# Altium PCB PCB.PcbDoc
Units mil, origin at the board's own origin, x right, y up, seen from the top; angles counter-clockwise.
Board outline 3211.75 x 2684.86 mil, 2 copper layers (Top Layer, Bottom Layer), stack 15.3 mil thick; 40 components, 80 nets, 228 pads, 30 vias.
Unrouted connection lines stored in the file: 8.
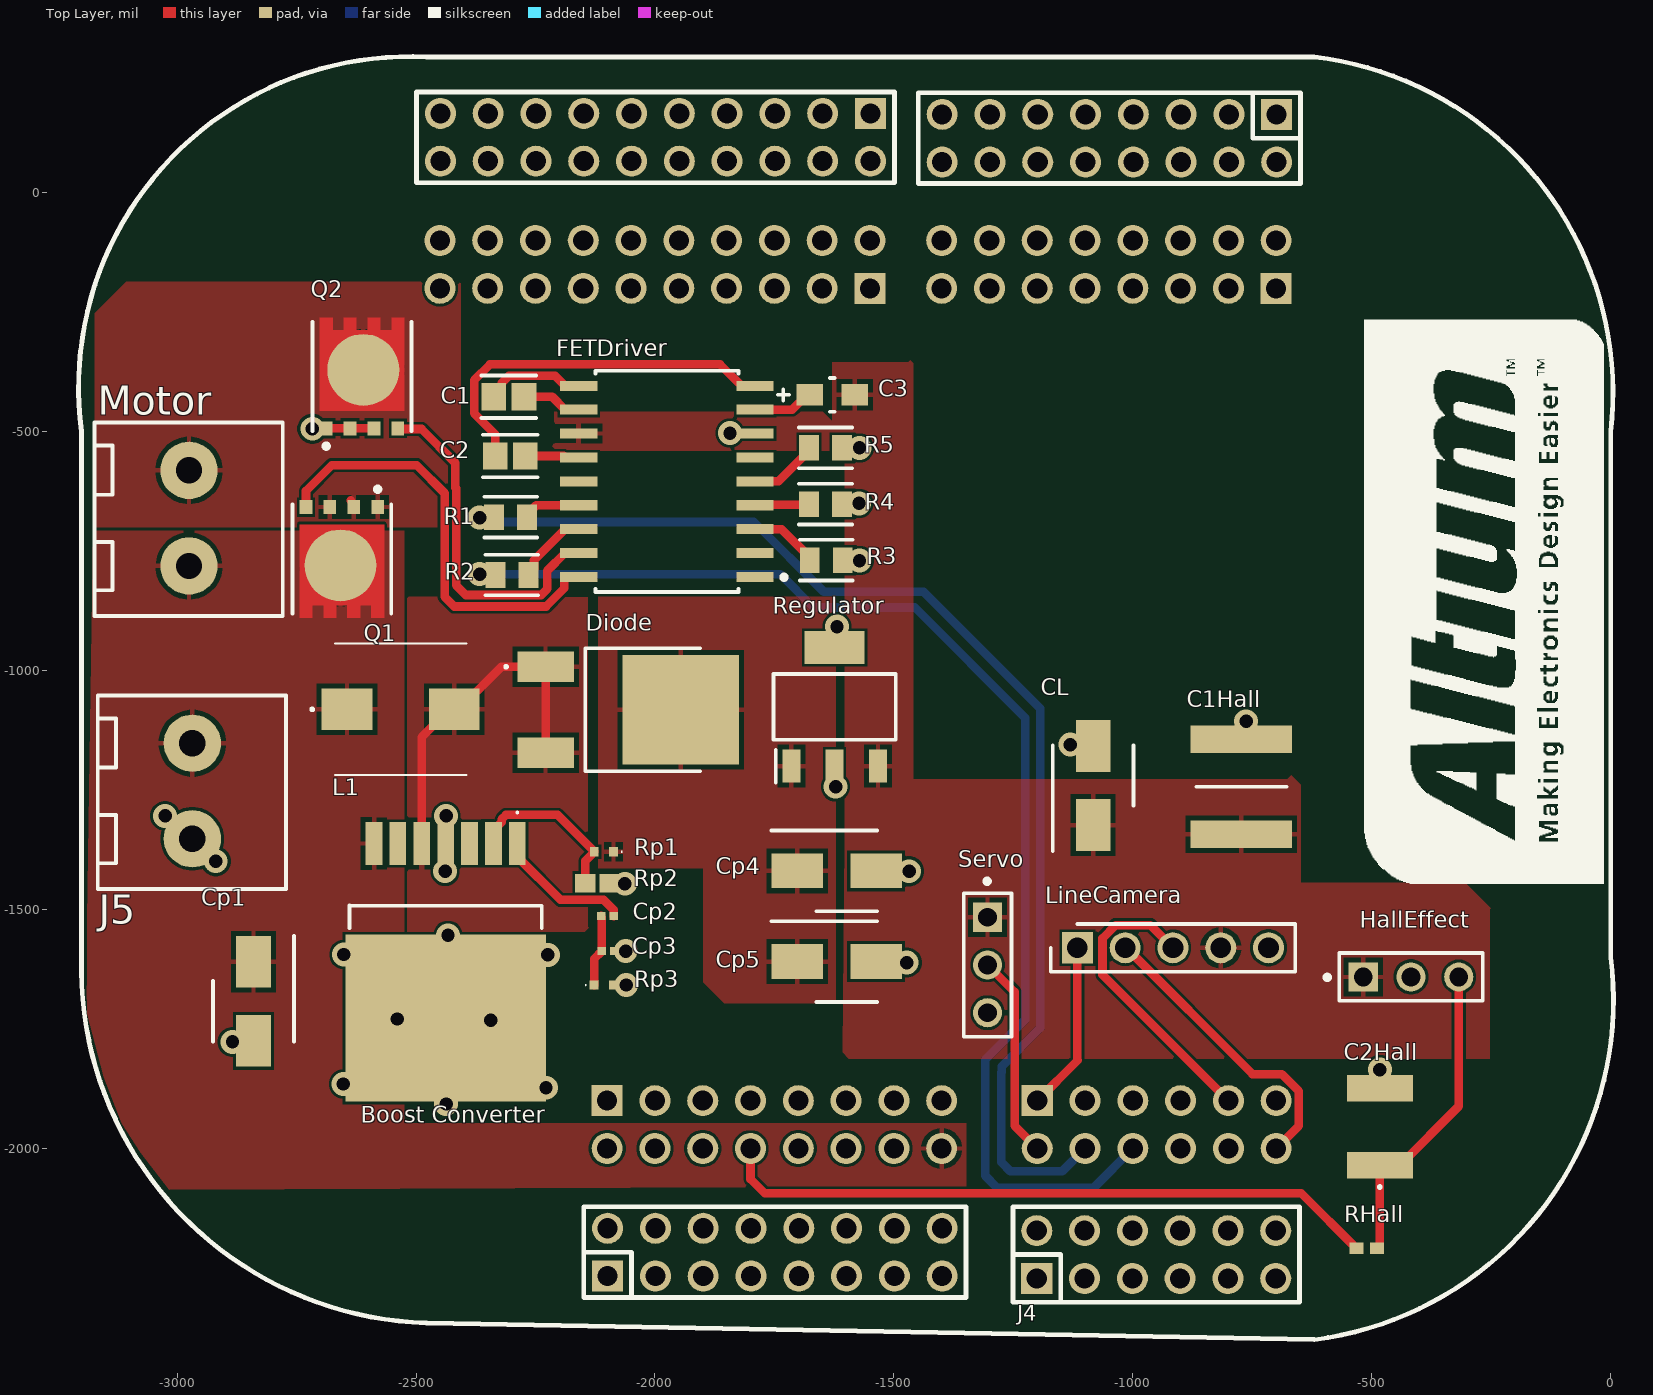
[diagram p0: Top Layer view]
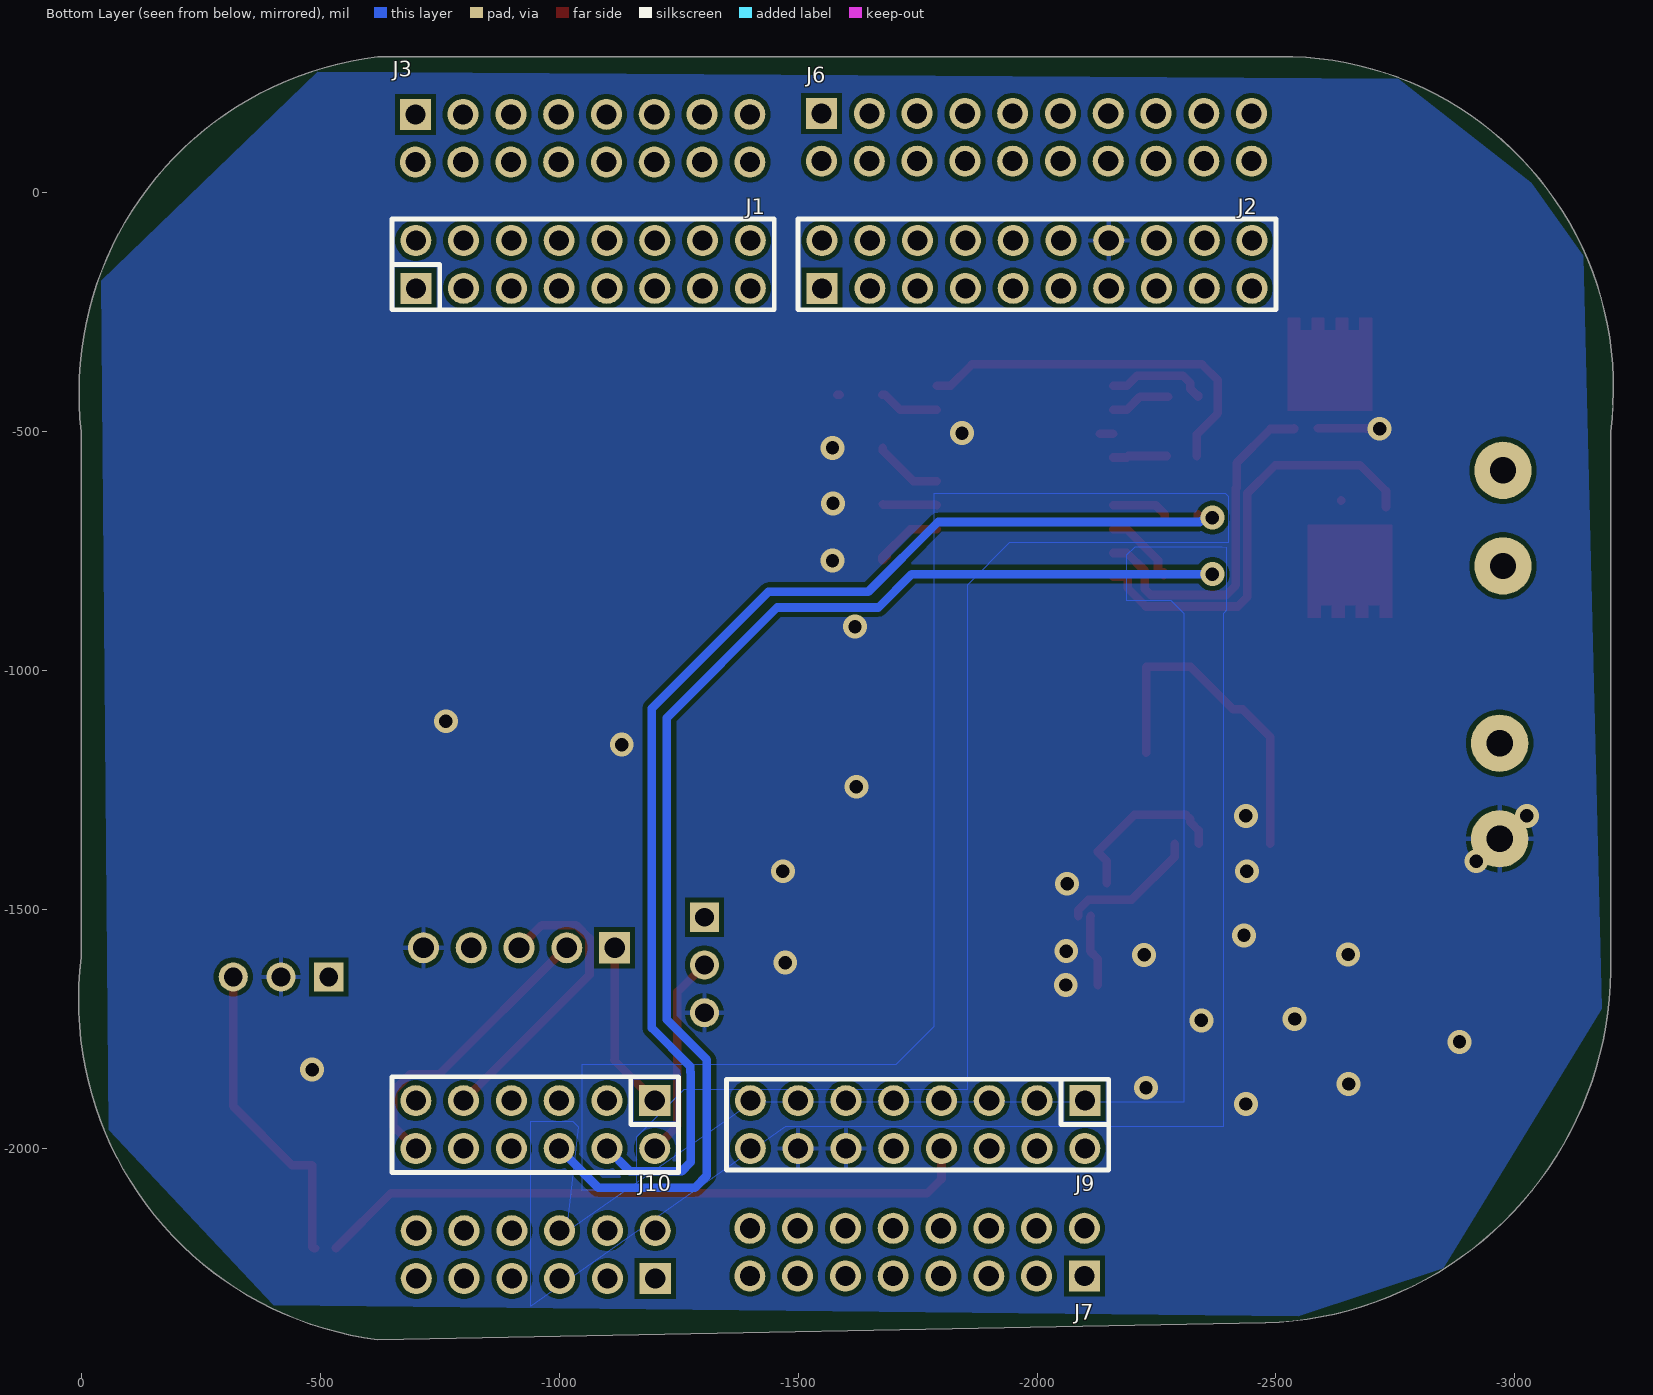
[diagram p1: Bottom Layer view, seen from below]
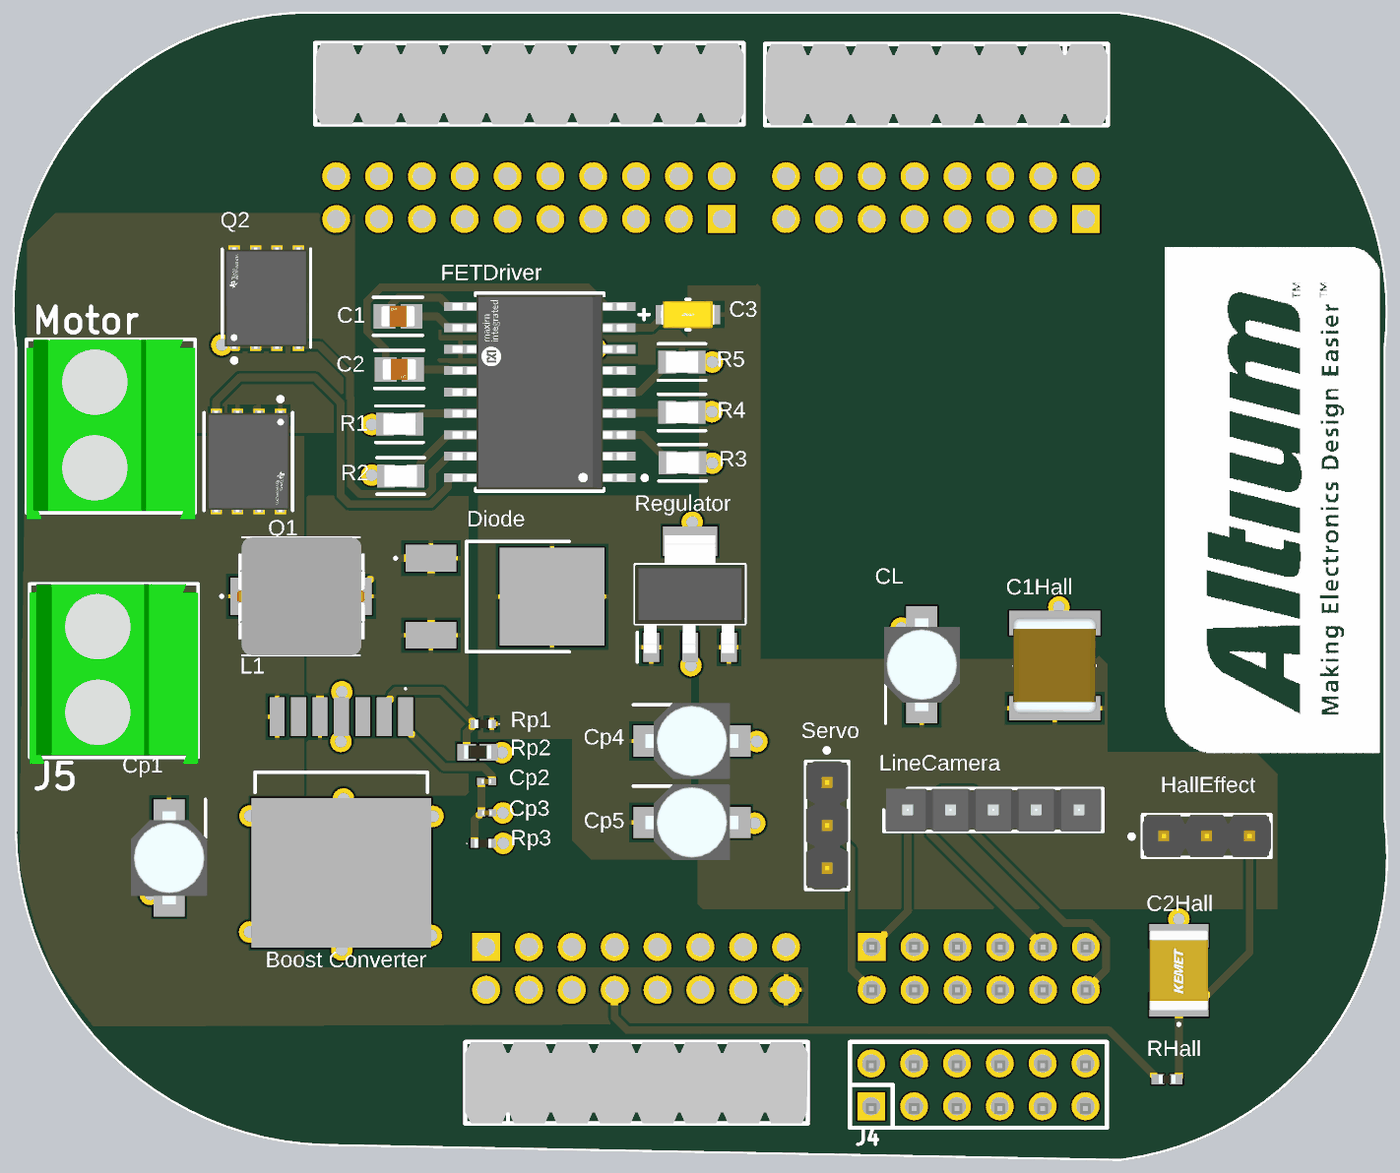
[diagram p2: 3D render of the assembled board from above, using the file's embedded part models]
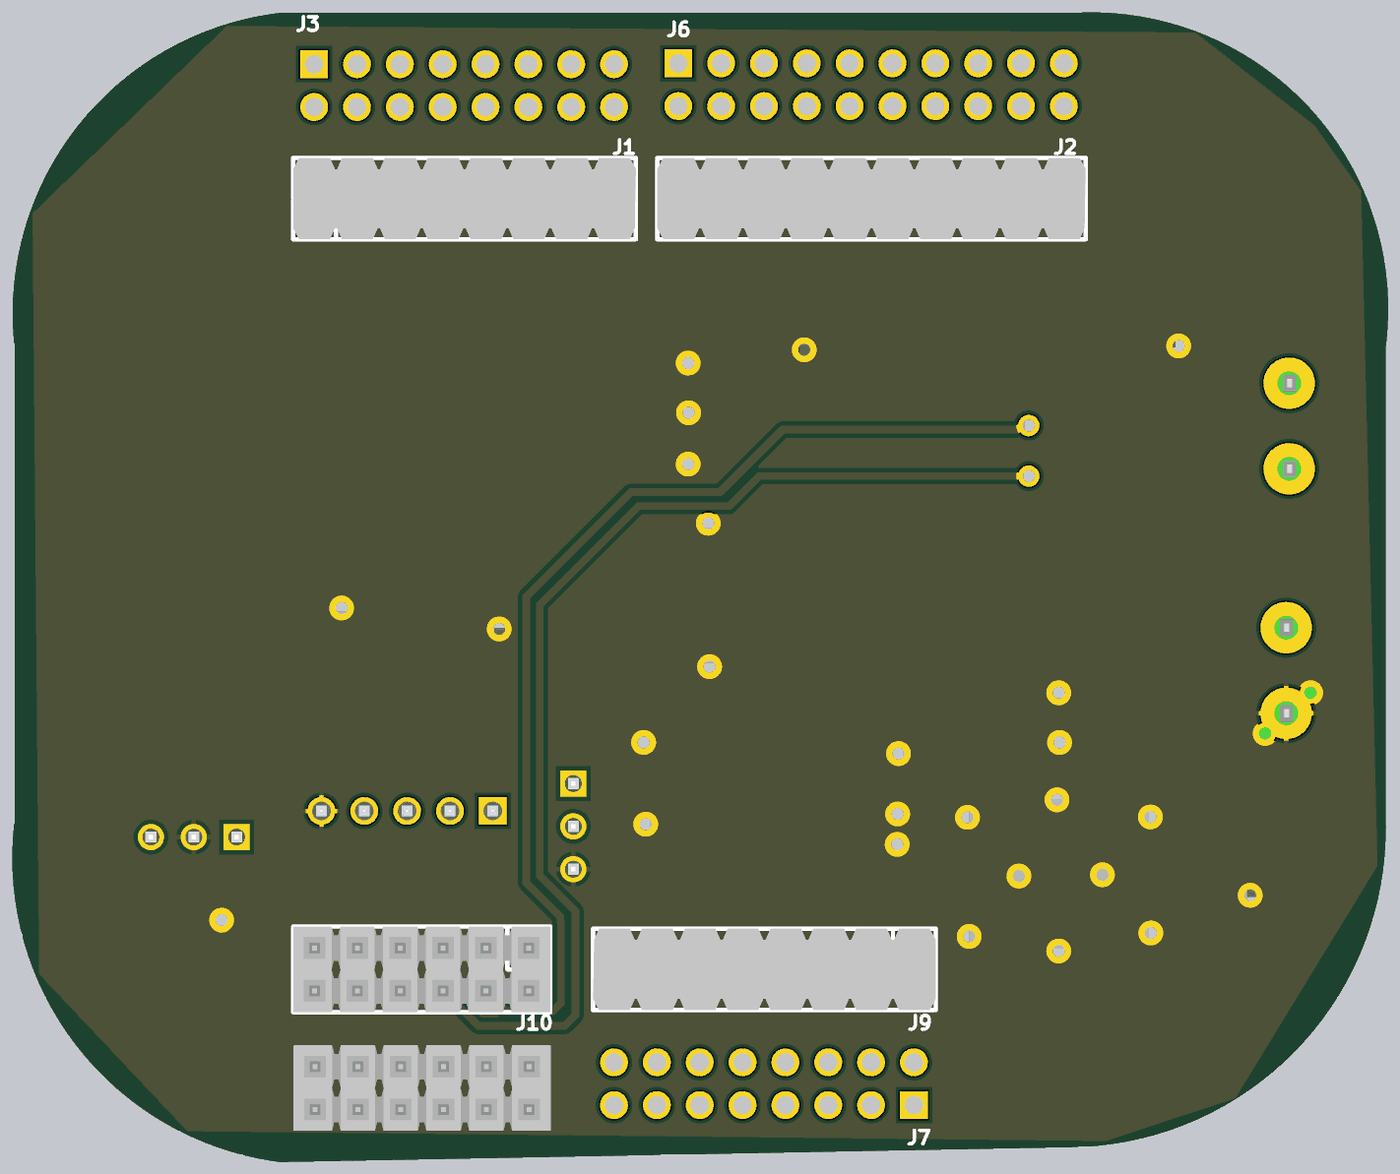
[diagram p3: 3D render of the assembled board from below, using the file's embedded part models]

## Layer stack, top to bottom
Top Solder: solder mask 0.4, Solder Resist, Dk 3.5
Top Layer: signal copper 1.4
Dielectric1: core 12.5, FR-4, Dk 4.8
Bottom Layer: signal copper 1.4
Bottom Solder: solder mask 0.4, Solder Resist, Dk 3.5

## Board outline
-3200,-1600 ccw(c-2456.51,-1621.51) -2478.02,-2365 -620.19,-2400 ccw(c-710.1,-1689.91) 0,-1600 0,-500 ccw(c-702.09,-418.09) -620.19,284 -989,284 -1736,284 -2478.02,284 ccw(c-2513.25,-407.99) -3200,-500

## Design rules (kind name [scope] priority, off if disabled: settings)
AssemblyTestPointUsage [All] p1 off:
AssemblyTestpoint [All] p1 off: testpointundercomponent=TRUE minsize=40 maxsize=100 preferedsize=60 minholesize=0 maxholesize=40 preferedholesize=32 testpointgrid=1 usegrid=TRUE gridtolerance=0.01 allowsidetop=TRUE allowsidebottom=TRUE
Clearance Polygon [(InNet('GND') AND InPoly)] p1: gap=10 ignorepadtopadclearanceinfootprint=FALSE
Clearance [All] p2: gap=6 ignorepadtopadclearanceinfootprint=FALSE
ComponentClearance [All] p1: gap=0 collisioncheckmode=3 verticalgap=0 showdistances=FALSE
FabricationTestPointUsage [All] p1 off: valid=0 allowmultiple=FALSE
FabricationTestpoint [All] p1 off: side=3 testpointundercomponent=TRUE minsize=40 maxsize=100 preferedsize=60 minholesize=0 maxholesize=40 preferedholesize=32 testpointgrid=1 allowsidetop=TRUE allowsidebottom=TRUE usegrid=TRUE gridtolerance=0.01
Height [All] p1: minheight=0 maxheight=1500 prefheight=500
HoleSize [All] p1: absolutevalues=TRUE maxlimit=250 minlimit=1 maxpercent=80.000 minpercent=20.000
HoleToHoleClearance [All] p1: gap=2 allowstackedmicrovias=TRUE
MinimumSolderMaskSliver [All] p1: minsoldermaskwidth=8.7
PlaneConnect [All] p1: planeconnectstyle=Direct reliefexpansion=20 reliefentries=4 reliefconductorwidth=10 reliefairgap=10
PolygonConnect PolygonConnect_1 [IsVia] p1: connectstyle=Direct reliefconductorwidth=10 reliefentries=4 polygonreliefangle="90 Angle" airgapwidth=10
PolygonConnect [All] p2: connectstyle=Relief reliefconductorwidth=10 reliefentries=4 polygonreliefangle="90 Angle" airgapwidth=10
RoutingVias [All] p1: holewidth=23.62 width=39.37 viastyle="Through Hole" minholewidth=23.62 minwidth=39.37 maxholewidth=50 maxwidth=100
ShortCircuit ShortCircuit_1 [HasFootprint('4-40 X 250') vs HasFootprint('4-40 X 250')] p1: allowed=FALSE
ShortCircuit [All] p2: allowed=FALSE
SilkToSilkClearance [All] p1: silktosilkclearance=0
SilkToSolderMaskClearance [IsPad] p1: minsilkscreentomaskgap=5.51 clearancetoexposedcopper=TRUE
SilkToSolderMaskClearance SilkscreenOverComponentPads [IsPad] p2: minsilkscreentomaskgap=0 clearancetoexposedcopper=TRUE
SolderMaskExpansion SolderMaskExpansion_1 [InComponent('LineCamera')] p1: expansion=0 istentingtop=FALSE
SolderMaskExpansion [All] p2: expansion=4 istentingtop=FALSE
UnRoutedNet [All] p1 off: checkbadconnections=TRUE
Width Vsw [InNet('VSW')] p1: maxlimit=31.8 minlimit=30.8 preferedwidth=30.8
Width [All] p2: maxlimit=18 minlimit=12 preferedwidth=18
16 further rules are at their usual default settings.

## Classes and differential pairs
component class Motor_Controller: C1 C2 C3 FETDriver Motor Q1 R1 R2 R3 R4 R5 Servo
component class "DC_DC Power Supply": "Boost Converter" C1Hall C2Hall CL Cp1 Cp2 Cp3 Cp4 Cp5 Diode HallEffect L1 LineCamera Regulator RHall Rp1 Rp2 Rp3
component class Connectors: J1 J2 J3 J4 J5 J6 J7 J9 J10

## Components (designator, comment, footprint, x,y, rotation, side; value= is the part's Value field where it differs from the comment)
"Boost Converter" "LT1370CR#PBF" LT1370CRPBF -2438,-1602 r180 top
C1 "08055C473JAT2A" FP-0805-L_2_01_0_2-W_1_25-IPC_B -2305.72,-427 r180 top
C1Hall "100nF" CAPC5750X450N -773,-1243 r90 top
C2 "08055C473JAT2A" FP-0805-L_2_01_0_2-W_1_25-IPC_B -2302.72,-551 r0 top
C2Hall "4.7nF" C1812 -483,-1954.71 r90 top
C3 "T491A105K025AT" FP-T491A105K025AT-MFG -1629,-423 r180 top
CL "22uF" CAPAE430X550N -1083,-1240.68 r90 top
Cp1 "22uF" CAPAE430X550N -2840,-1692 r270 top
Cp2 "0.047uF" CAPC0603X33N -2099.13,-1513.57 r180 top
Cp3 "0.0047uF" CAPC0603X33N -2098.15,-1586.57 r0 top
Cp4 "22uF" CAPAE430X550N -1619.68,-1419 r0 top
Cp5 "0.47uF" CAPAE430X550N -1619.68,-1609 r0 top
Diode "MBRD835L" MBRD835L -2026,-1082 r180 top
FETDriver "MAX620CWN+" FP-W18-1-MFG -1975,-604 r180 top
HallEffect "90120-0763" FP-90120-0763-MFG -418,-1641 r0 top
J1 "67996-416HLF" 67996-416HLF#1 -1050,-150 r180 bottom locked
J2 "67996-420HLF" 67996-420HLF#1 -2000,-150 r180 bottom locked
J3 "67996-416HLF" 67996-416HLF#2 -1050,116 r0 bottom
J4 "67996-412HLF" 67996-412HLF#1 -951,-2227 r180 top locked
J5 "282857-2" 282857-2 -2968,-1152 r180 top
J6 "67996-420HLF" 67996-420HLF#2 -1999,116 r0 bottom
J7 "67996-416HLF" 67996-416HLF#2 -1748,-2219 r180 bottom locked
J9 "67996-416HLF" 67996-416HLF#1 -1750,-1950 r0 bottom locked
J10 "67996-412HLF" 67996-412HLF#2 -950,-1950 r0 bottom locked
L1 "4.7uH" ETQ-P4M_KFM -2532.2,-1081 r0 top
LineCamera "61300511121" HDRV5W64P0X254_1X5_1270X254X854P -1116,-1580 r0 top
Motor "282857-2" 282857-2 -2975,-581 r180 top
Q1 "CSD17306Q5A" FP-DQJ0008A-MFG -2655.24,-766.22 r270 top
Q2 "CSD17306Q5A" FP-DQJ0008A-MFG -2613,-384.63 r90 top
R1 "CR0805-JW-103ELF" FP-CR0805-IPC_B -2302,-679 r0 top
R2 "CR0805-JW-103ELF" FP-CR0805-IPC_B -2299.47,-800 r0 top
R3 "CR0805-JW-103ELF" FP-CR0805-IPC_B -1641.53,-769 r180 top
R4 "CR0805-JW-103ELF" FP-CR0805-IPC_B -1643,-651.53 r180 top
R5 "CR0805-JW-103ELF" FP-CR0805-IPC_B -1643,-534.06 r180 top
Regulator "LM2940IMPX-5.0_NOPB" SOT230P700X180-4N -1624,-1076 r90 top
RHall "10k" RESC1005X40N -510.65,-2209 r0 top
Rp1 "59K" ERJ2RKD1004X -2106.84,-1379 r180 top
Rp2 "6.8K" RESC1608X55N -2120,-1445 r0 top
Rp3 "2K" ERJ2RKD1004X -2107.16,-1658 r0 top
Servo "90120-0763" FP-90120-0763-MFG -1304,-1616 r270 top

## Footprints (in the part's own frame and the unit in brackets; to place one, negate y for a bottom-side part, rotate by r counter-clockwise, add the part's x,y. Pads: shape width x height; smd on the part's side, far side on the other; paste and mask are expansions set on the pad)
67996-412HLF#1 [mil] "CONN HEADER 12POS .100 STR TIN"
  rect 65x65 hole 42: 1(250,45)
  round 65 hole 42: 2(250,-55) 3(150,45) 4(150,-55) 5(50,45) 6(50,-55) 7(-50,45) 8(-50,-55) 9(-150,45) 10(-150,-55) 11(-250,45) 12(-250,-55)
  silkscreen extent -300,-105 300,95, body extent -300,-100 300,100, height 80
67996-412HLF#2 [mil] "CONN HEADER 12POS .100 STR TIN"
  rect 65x65 hole 42: 1(-250,-50)
  round 65 hole 42: 2(-250,50) 3(-150,-50) 4(-150,50) 5(-50,-50) 6(-50,50) 7(50,-50) 8(50,50) 9(150,-50) 10(150,50) 11(250,-50) 12(250,50)
  silkscreen extent -300,-100 300,100, body extent -300,-100 300,100, height 331
67996-416HLF#1 [mil] "CONN HEADER 16POS .100 STR TIN"
  rect 65x65 hole 42: 1(-350,-50)
  round 65 hole 42: 2(-350,50) 3(-250,-50) 4(-250,50) 5(-150,-50) 6(-150,50) 7(-50,-50) 8(-50,50) 9(50,-50) 10(50,50) 11(150,-50) 12(150,50) 13(250,-50) 14(250,50) 15(350,-50) 16(350,50)
  silkscreen extent -400,-95 400,95, body extent -400,-95 400,95, height 305
67996-416HLF#2 [mil] "CONN HEADER 16POS .100 STR TIN"
  rect 65x65 hole 42: 1(351,-48)
  round 65 hole 42: 2(351,52) 3(251,-48) 4(251,52) 5(151,-48) 6(151,52) 7(51,-48) 8(51,52) 9(-49,-48) 10(-49,52) 11(-149,-48) 12(-149,52) 13(-249,-48) 14(-249,52) 15(-349,-48) 16(-349,52)
  body extent -399,-93 401,97, height 305
67996-420HLF#1 [mil] "CONN HEADER 20POS .100 STR TIN"
  rect 65x65 hole 42: 1(-450,-50)
  round 65 hole 42: 2(-450,50) 3(-350,-50) 4(-350,50) 5(-250,-50) 6(-250,50) 7(-150,-50) 8(-150,50) 9(-50,-50) 10(-50,50) 11(50,-50) 12(50,50) 13(150,-50) 14(150,50) 15(250,-50) 16(250,50) 17(350,-50) 18(350,50) 19(450,-50) 20(450,50)
  silkscreen extent -500,-95 500,95, body extent -500,-95 500,95, height 305
67996-420HLF#2 [mil] "CONN 20 PIN 0.100 IN"
  rect 65x65 hole 42: 1(450,-50)
  round 65 hole 42: 2(450,50) 3(350,-50) 4(350,50) 5(250,-50) 6(250,50) 7(150,-50) 8(150,50) 9(50,-50) 10(50,50) 11(-50,-50) 12(-50,50) 13(-150,-50) 14(-150,50) 15(-250,-50) 16(-250,50) 17(-350,-50) 18(-350,50) 19(-450,-50) 20(-450,50)
  body extent -500,-95 500,95, height 305
282857-2 [mil] "TE CONNECTIVITY / BUCHANAN  282857-2  Wire-To-Board Terminal Block, 2, 300 V, 24 A, 30 AWG, 12 AWG, 3 mm²"
  round 120 hole 55: 1(0,0) 2(0,200)
  silkscreen extent -196,-100 198,305, body extent -196,-100 198,320, height 752
C1812 [mm]
  rect 1.4x3.5 smd: 1(-2.05,0) 2(2.05,0)
  silkscreen extent -3.25,-0.05 -3.15,0.05, body extent -2.4,-1.75 2.4,1.75, height 1.4
CAPAE430X550N [mm]
  rect 2.75x1.85 smd: 1(-2.1,0) 2(2.1,0)
  silkscreen extent -3.47,-2.15 2.15,2.15, body extent -2.75,-2.25 2.75,2.25, height 5.5
CAPC0603X33N [mm]
  rect 0.46x0.42 smd: 1(-0.33,0) 2(0.33,0)
  body extent -0.3,-0.15 0.3,0.15, height 0.33
CAPC5750X450N [mm]
  rect 1.45x5.41 smd: 1(-2.53,0) 2(2.53,0)
  silkscreen extent 0,-2.4 0,2.4, body extent -2.85,-2.5 2.85,2.5, height 4.5
ERJ2RKD1004X [mm]
  rect 0.475x0.5 smd: 1(-0.512,0) 2(0.512,0)
  silkscreen extent -0.97,-0.03 -0.93,0.03, body extent -0.5,-0.25 0.5,0.25, height 0.35
ETQ-P4M_KFM [mm]
  rect 2.7x2.2 smd: 1(-2.85,0) 2(2.85,0)
  silkscreen extent -4.75,-3.5 3.5,3.5, body extent -3.78,-3.5 3.79,3.5, height 5.4
FP-0805-L_2_01_0_2-W_1_25-IPC_B [mil]
  rect 51.36x57.33 smd paste+0 mask+0: 1(-31.72,0) 2(31.72,0)
  silkscreen extent -57,-44 57,44, body extent -67,-39 67,39, height 10
FP-90120-0763-MFG [mm]
  rect 1.55x1.55 hole 1 paste-2539.97 mask+0: 1(-2.54,0)
  round 1.55 hole 1 paste-2539.97 mask+0: 2(0,0) 3(2.54,0)
  silkscreen extent -4.57,-1.27 3.81,1.27, body extent -3.91,-1.37 3.91,1.37, height 0.25
FP-CR0805-IPC_B [mil]
  rect 41.66x53.63 smd paste+0 mask+0: 1(-34.53,0) 2(34.53,0)
  silkscreen extent -55,-43 55,43, body extent -65,-37 65,37, height 10
FP-DQJ0008A-MFG [mm]
  rect 0.75x0.675 smd paste-1000 mask+0: 1(-2.752,1.905) 2(-2.752,0.635) 3(-2.752,-0.635) 4(-2.752,-1.905)
  round 3.821 smd paste-1000 mask+0: 5-6-7-8(0.35,-0.07)
  Top Layer region: 3.127,-2.242 3.127,-1.568 2.472,-1.568 2.472,-0.972 3.127,-0.972 3.127,-0.297 2.472,-0.297 2.472,0.298 3.127,0.298 3.127,0.973 2.472,0.973 2.472,1.568 3.127,1.568 3.127,2.243 -1.823,2.242 -1.823,-2.242
  silkscreen extent -3.82,-2.63 2.9,2.63, body extent -3.23,-2.6 3.23,2.6, height 0.25
FP-T491A105K025AT-MFG [mm]
  rect 1.42x1.13 smd paste+0 mask+0: 1(-1.2,0) 2(1.2,0)
  silkscreen extent -0.12,-0.9 2.9,0.9, body extent -2.03,-1.02 2.03,1.02, height 0.25
FP-W18-1-MFG [mil]
  rect 77.99x20.98 smd paste+0 mask+0: 1(-184.51,200) 2(-184.51,150) 3(-184.51,100) 4(-184.51,50) 5(-184.51,0) 6(-184.51,-50) 7(-184.51,-100) 8(-184.51,-150) 9(-184.51,-200) 10(184.51,-200) 11(184.51,-150) 12(184.51,-100) 13(184.51,-50) 14(184.51,0) 15(184.51,50) 16(184.51,100) 17(184.51,150) 18(184.51,200)
  silkscreen extent -250,-231 150,231, body extent -227,-238 227,238, height 10
HDRV5W64P0X254_1X5_1270X254X854P [mm]
  rect 1.65x1.65 hole 1.1: 1(0,0)
  round 1.65 hole 1.1: 2(2.54,0) 3(5.08,0) 4(7.62,0) 5(10.16,0)
  silkscreen extent -1.42,-1.27 11.58,1.27, body extent -1.27,-1.27 11.43,1.27, height 8.54
LT1370CRPBF [mil]
  rect 35x90 smd: 1(-150,-240) 2(-100,-240) 3(-50,-240) 4(0,-240) 5(50,-240) 6(100,-240) 7(150,-240)
  rect 420x350 smd: 8(0,125)
  silkscreen extent -201,-307 201,-63
MBRD835L [mm]
  rect 3x1.6 smd: 1(5.152,-2.285) 3(5.152,2.285)
  rect 6.2x5.8 smd: 2(-2.028,0)
  silkscreen extent -3.05,-3.27 7.3,3.27
RESC1005X40N [mm]
  rect 0.75x0.6 smd: 1(-0.55,0) 2(0.55,0)
  body extent -0.5,-0.25 0.5,0.25, height 0.4
RESC1608X55N [mm]
  rect 1.1x1 smd: 1(-0.65,0) 2(0.65,0)
  body extent -0.8,-0.4 0.8,0.4, height 0.55
SOT230P700X180-4N [mm]
  rect 1.75x0.95 smd: 1(-3.15,2.3) 2(-3.15,0) 3(-3.15,-2.3)
  rect 1.75x3.2 smd: 4(3.15,0)
  silkscreen extent -4.03,-3.25 1.75,3.25, body extent -3.5,-3.25 3.5,3.25, height 1.68

## Part data
"Boost Converter": "12V Boost Converter", Manufacturer_Name="Analog Devices", Mouser Part Number=584-LT1370CR#PBF, Arrow Part Number=LT1370CR#PBF, Arrow Price/Stock=https://www.arrow.com/en/products/lt1370crpbf/analog-devices?utm_currency=USD&region=nac, Datasheet Link=https://www.analog.com/media/en/technical-documentation/data-sheets/1370fs.pdf, Height=4.877mm, Manufacturer_Part_Number=LT1370CR#PBF, Mouser Price/Stock=https://www.mouser.co.uk/ProductDetail/Analog-Devices/LT1370CRPBF?qs=ytflclh7QUVSQHKAEhLuUA%3D%3D
C1 C2: library part CMP-2007-04425-2, "General Purpose Ceramic Capacitor, 0805, 47nF, 5%, X7R, 0.15, 50V", Capacitance=47nF, Case Code (Imperial)=0805, Case Code (Metric)=2012, Dielectric=X7R, Dielectric Material=Ceramic, Max Operating Temperature=125°C, Min Operating Temperature=-55°C, Package Quantity=1, Tolerance=10%, Voltage=50V, Case/Package=0805, Construction=Flat, Contact Plating=Tin, Depth=1.25mm, Dissipation Factor=2.5%, Height=0.94mm, Lead Free="Lead Free", Length=2.01mm, Mount="Surface Mount", Number of Pins=2, Packaging="Tape and Reel", Radiation Hardening=No, REACH SVHC="No SVHC", RoHS Compliant=Yes, Series=-, Termination=SMD/SMT, Thickness=0.037inch, Voltage Rating=50V, Voltage Rating (DC)=50V, Width=0.049inch
C1Hall: library part 2220Y2K00104KXRWS3, "Capacitor", Manufacturer_Name=Knowles, Mouser Part Number=843-2220Y2K104KXRWS2, Datasheet Link=https://www.knowlescapacitors.com/getattachment/e7984308-bd6c-4e1d-824e-8ae6037a2b25/StackiCap, Height=4.5mm, Manufacturer_Part_Number=2220Y2K00104KXRWS3, Mouser Price/Stock=https://www.mouser.co.uk/ProductDetail/Knowles-Syfer/2220Y2K00104KXRWS3?qs=7MVldsJ5UaxGI75VDyrs7w%3D%3D
C2Hall: library part C1812C472KGRACAUTO, "Capacitor", Manufacturer_Name=KEMET, Mouser Part Number=80-C1812C472KGRAUTO, Arrow Part Number=C1812C472KGRACAUTO, Arrow Price/Stock=https://www.arrow.com/en/products/c1812c472kgracauto/kemet-corporation, Datasheet Link=https://content.kemet.com/datasheets/KEM_C1076_X7R_HV_AUTO_SMD.pdf, Height=1.55mm, Manufacturer_Part_Number=C1812C472KGRACAUTO, Mouser Price/Stock=https://www.mouser.co.uk/ProductDetail/KEMET/C1812C472KGRACAUTO?qs=f9yNj16SXrLK%252BHmDDKifeA%3D%3D
C3: library part CMP-03017-000047-1, "CAP TANT 1UF 10% 25V 1206", Capacitance=1uF, Case Code (Imperial)=1206, Case Code (Metric)=3216, Dielectric Material=Tantalum, ESR (Equivalent Series Resistance)=8R, Leakage Current=500nA, Max Operating Temperature=125°C, Min Operating Temperature=-55°C, Package Quantity=1, Tolerance=20%, Voltage=25V, Case/Package=1206, Depth=1.6mm, Dissipation Factor=4%, Features="General Purpose", Height=1.6mm, Height - Seated (Max)=0.071inch, Lead Free="Lead Free", Lead Pitch=1.2mm, Length=3.2mm, Life (Hours)=2000Hour, Mount="Surface Mount", Number of Pins=2, Packaging="Tape and Reel", Polarity=Polar, Radiation Hardening=No, REACH SVHC="No SVHC", RoHS Compliant=Yes, Termination=SMD/SMT, Voltage Rating=25V, Voltage Rating (DC)=25V, Width=1.6mm
CL Cp1 Cp4: library part UWP1HR22MCL1GB, "Capacitor Polarised", Manufacturer_Name=Nichicon, Mouser Part Number=647-UWP1HR22MCL, Datasheet Link=https://www.nichicon.co.jp/english/series_items/catalog_pdf/e-uwp.pdf, Height=5.5mm, Manufacturer_Part_Number=UWP1HR22MCL1GB, Mouser Price/Stock=https://www.mouser.co.uk/ProductDetail/Nichicon/UWP1HR22MCL1GB?qs=3GbUB62Nf7dRFOPfOwO6sg%3D%3D
Cp2: library part GRM033R61C473KE84D, "Capacitor", Manufacturer_Name="Murata Electronics", Mouser Part Number=81-GRM033R61C473KE4D, Arrow Part Number=GRM033R61C473KE84D, Arrow Price/Stock=https://www.arrow.com/en/products/grm033r61c473ke84d/murata-manufacturing, Datasheet Link=https://search.murata.co.jp/Ceramy/image/img/A01X/G101/ENG/GRM033R61C473KE84-01A.pdf, Height=0.33mm, Manufacturer_Part_Number=GRM033R61C473KE84D, Mouser Price/Stock=https://www.mouser.co.uk/ProductDetail/Murata-Electronics/GRM033R61C473KE84D?qs=vCoBJ5OiJk4E%252B%2Fgs75qrtQ%3D%3D
Cp3: library part GRM033R71A472KA01D, "Capacitor", Manufacturer_Name="Murata Electronics", Mouser Part Number=81-GRM033R71A472KA1D, Arrow Part Number=GRM033R71A472KA01D, Arrow Price/Stock=https://www.arrow.com/en/products/grm033r71a472ka01d/murata-manufacturing, Datasheet Link=https://search.murata.co.jp/Ceramy/image/img/A01X/G101/ENG/GRM033R71A472KA01-01A.pdf, Height=0.33mm, Manufacturer_Part_Number=GRM033R71A472KA01D, Mouser Price/Stock=https://www.mouser.co.uk/ProductDetail/Murata-Electronics/GRM033R71A472KA01D?qs=7RtWncwVCuzI4WvsbOl%2FQA%3D%3D
Cp5: library part 865230640004, "Capacitor Polarised", Manufacturer_Name="Wurth Elektronik", Mouser Part Number=710-865230640004, Datasheet Link=https://componentsearchengine.com/Datasheets/1/865230640004.pdf, Height=5.5mm, Manufacturer_Part_Number=865230640004, Mouser Price/Stock=https://www.mouser.co.uk/ProductDetail/Wurth-Elektronik/865230640004?qs=0KOYDY2FL2%2FYTqRiFtrQpw%3D%3D
Diode: "Diode", Manufacturer_Name=onsemi, Mouser Part Number=863-MBRD835L, Datasheet Link=https://www.onsemi.com/pdf/datasheet/mbrd835l-d.pdf, Height=2.38mm, Manufacturer_Part_Number=MBRD835L, Mouser Price/Stock=https://www.mouser.co.uk/ProductDetail/onsemi/MBRD835L?qs=3JMERSakebplE9MTkRawVw%3D%3D
FETDriver: library part CMP-05716-000008-1, "IC GATE DRVR HIGH-SIDE 18SOIC", Case/Package=SOIC, Max Operating Temperature=70°C, Max Output Current=25mA, Max Power Dissipation=762mW, Max Supply Current=500uA, Max Supply Voltage=16.5V, Min Operating Temperature=0°C, Min Supply Voltage=4.5V, Package Quantity=40, Fall Time=2500ns, Lead Free="Lead Free", Mount="Surface Mount", Nominal Supply Current=500uA, Number of Drivers=4, Number of Outputs=4, Number of Pins=18, Packaging=Rail/Tube, Radiation Hardening=No, Rise Time=1700ns, RoHS Compliant=Yes, Series=-, Supply Current=500uA
HallEffect Servo: library part CMP-04776-000084-1, "CONN HEADER VERT 3POS 2.54MM", Current Rating=3A, Manufacturer=Molex, Temperature="-55°C to +125°C", Temperature Range High=+125°C, Temperature Range Low=-55°C, Voltage Rating=350V, Automotive=No, Category=Conn, ComponentLink2Description=Datasheet, ComponentLink2URL=https://www.molex.com/webdocs/datasheets/pdf/en-us/0901200763_PCB_HEADERS.pdf, Conn Gender=Male, Conn Orientation=Vertical, Contact Material=Gold,Nickel, Device Class L1=Connectors, Device Class L2="Headers and Wire Housings", Device Class L3=unset, Digikey Description="CONN HEADER VERT 3POS 2.54MM", Footprint Url=https://www.molex.com/pdm_docs/sd/901200763_sd.pdf, Height=5.8mm, Lead Free=Yes, Manufacturer Part Number=90120-0763, Mouser Description="Board-To-Board Connector, C-Grid III 90120 Series, Through Hole, Header, 3, 2.54 mm", Number of Contacts=3, Number of Rows=1, Octopart=https://octopart.com/90120-0763-molex-655433, Package=90120-0763, Pitch=2.54mm, RoHS=TRUE
J1 J9: "CONN HEADER 16POS .100 STR TIN", Color=Black, Manufacturer=FCI, Supplier Part Number 1=609-3220-ND, Category="Connectors, Interconnects", ComponentLink1Description=http://portal.fciconnect.com/Comergent//fci/drawing/67996.pdf, ComponentLink1URL=http://portal.fciconnect.com/Comergent//fci/drawing/67996.pdf, Connector Type="Header, Unshrouded", Contact Finish=Tin, Contact Finish Thickness="100µin (2.54µm)", Contact Mating Length="0.230\" (5.84mm)", Contact Type="Male Pin", Fastening Type=-, Features=-, Manufacturer Part Number=67996-416HLF, Mounting Type="Through Hole", Number of Positions=16, Number of Positions Loaded=All, Number of Rows=2, Packaging=Bulk, Pitch="0.100\" (2.54mm)", Pricing 1="1=0.56, 10=0.521, 25=0.4684, 50=0.4164, 100=0.3991, 250=0.36436, 500=0.347, 1000=0.28628, 2500=0.26025 (USD)", RoHS="RoHS Compliant", Row Spacing="0.100\" (2.54mm)", Stock 1=1589, Supplier 1=Digi-Key, Termination=Solder
J2: "CONN HEADER 20POS .100 STR TIN", Color=Black, Manufacturer=FCI, Supplier Part Number 1=609-3221-ND, Category="Connectors, Interconnects", ComponentLink1Description=http://portal.fciconnect.com/Comergent//fci/drawing/67996.pdf, ComponentLink1URL=http://portal.fciconnect.com/Comergent//fci/drawing/67996.pdf, Connector Type="Header, Unshrouded", Contact Finish=Tin, Contact Finish Thickness="100µin (2.54µm)", Contact Mating Length="0.230\" (5.84mm)", Contact Type="Male Pin", Fastening Type=-, Features=-, Manufacturer Part Number=67996-420HLF, Mounting Type="Through Hole", Number of Positions=20, Number of Positions Loaded=All, Number of Rows=2, Packaging=Bulk, Pitch="0.100\" (2.54mm)", Pricing 1="1=0.66, 10=0.619, 25=0.5572, 50=0.4952, 100=0.4745, 250=0.43324, 500=0.4126, 1000=0.3404, 2500=0.30945 (USD)", RoHS="RoHS Compliant", Row Spacing="0.100\" (2.54mm)", Stock 1=596, Supplier 1=Digi-Key, Termination=Solder
J3 J7: "CONN HEADER 16POS .100 STR TIN", Supplier Part Number 1="Mouser - 649-67996-416HLF", Supplier 1=Octopart
J4: "CONN HEADER 12POS .100 STR TIN", Supplier Part Number 1="Mouser - 649-67996-412HLF", Supplier 1=Octopart
J5 Motor: "TERM BLOCK 2POS SIDE ENT 5.08MM", Color=Green, Current=24A, Manufacturer="TE Connectivity", Operating Temperature=-, Supplier Part Number 1=A98359-ND, Voltage=300V, Category="Connectors, Interconnects", Clamp Material - Plating="Brass - Nickel Plated", ComponentLink1Description=http://documents.tycoelectronics.com/commerce/DocumentDelivery/DDEController?Action=srchrtrv&DocNm=282857&DocType=CD&DocLang=EN, ComponentLink1URL=http://documents.tycoelectronics.com/commerce/DocumentDelivery/DDEController?Action=srchrtrv&DocNm=282857&DocType=CD&DocLang=EN, Contact Material - Plating="Brass - Tin Plated", Features="Interlocking (Side)", Housing Material="Polyamide (PA66), Nylon 6/6", Manufacturer Part Number=282857-2, Mating Orientation="Horizontal with Board", Mounting Type="Through Hole", Number of Levels=1, Packaging=Bulk, Pitch="0.200\" (5.08mm)", Positions Per Level=2, Pricing 1="1=1.19, 10=1.046, 25=0.984, 50=0.9432, 100=0.9021, 250=0.82012, 500=0.7381, 1000=0.65608, 2500=0.59457 (USD)", RoHS="RoHS Compliant", Screw Material - Plating="Brass - Nickel Plated", Screw Thread=M3, Stock 1=1811, Supplier 1=Digi-Key, Torque - Screw="0.79 Nm (7.0 Lb-In)", Wire Gauge="12-30 AWG", Wire Termination="Screw - Rising Cage Clamp"
J6: "CONN HEADER 20POS .100 STR TIN", Supplier Part Number 1="Mouser - 649-67996-420HLF", Supplier 1=Octopart
J10: "CONN HEADER 12POS .100 STR TIN", Color=Black, Manufacturer=FCI, Supplier Part Number 1=609-3219-ND, Category="Connectors, Interconnects", ComponentLink1Description=http://portal.fciconnect.com/Comergent//fci/drawing/67996.pdf, ComponentLink1URL=http://portal.fciconnect.com/Comergent//fci/drawing/67996.pdf, Connector Type="Header, Unshrouded", Contact Finish=Tin, Contact Finish Thickness="100µin (2.54µm)", Contact Mating Length="0.230\" (5.84mm)", Contact Type="Male Pin", Fastening Type=-, Features=-, Manufacturer Part Number=67996-412HLF, Mounting Type="Through Hole", Number of Positions=12, Number of Positions Loaded=All, Number of Rows=2, Packaging=Bulk, Pitch="0.100\" (2.54mm)", Pricing 1="1=0.4, 10=0.379, 25=0.3248, 50=0.276, 100=0.2651, 250=0.23804, 500=0.22722, 1000=0.18935, 2500=0.17312 (USD)", RoHS="RoHS Compliant", Row Spacing="0.100\" (2.54mm)", Stock 1=1044, Supplier 1=Digi-Key, Termination=Solder
L1: library part ETQ-P4M4R7KFM, "Inductor", Manufacturer_Name=Panasonic, Mouser Part Number=667-ETQ-P4M4R7KFM, Datasheet Link=http://industrial.panasonic.com/cdbs/www-data/pdf/AGL0000/AGL0000C73.pdf, Height=4.8mm, Manufacturer_Part_Number=ETQ-P4M4R7KFM, Mouser Price/Stock=https://www.mouser.co.uk/ProductDetail/Panasonic/ETQ-P4M4R7KFM?qs=PqoDHHvF649m773nMECVZA%3D%3D
LineCamera: "Connector", Manufacturer_Name="Wurth Elektronik", Mouser Part Number=710-61300511121, Datasheet Link=http://katalog.we-online.de/em/datasheet/6130xx11121.pdf, Height=8.54mm, Manufacturer_Part_Number=61300511121, Mouser Price/Stock=https://www.mouser.co.uk/ProductDetail/Wurth-Elektronik/61300511121?qs=PhR8RmCirEZCsCRHq%252BvfRQ%3D%3D
Q1 Q2: library part CMP-04962-000068-1, "MOSFET N-CH 30V 24A/100A 8VSON", Case/Package=SON, Continuous Drain Current (ID)=100A, Drain to Source Breakdown Voltage=30V, Drain to Source Resistance=3.3mR, Gate to Source Voltage (Vgs)=10V, Input Capacitance=2.17nF, Max Operating Temperature=150°C, Max Power Dissipation=3.2W, Min Operating Temperature=-55°C, Package Quantity=1, Threshold Voltage=1.1V, Contact Plating=Tin, Drain to Source Voltage (Vdss)=30V, Element Configuration=Single, Fall Time=6.4ns, Height=1.1mm, Lead Free="Contains Lead", Length=5.8mm, Mount="Surface Mount", Nominal Vgs=1.1V, Number of Elements=1, Number of Pins=8, Packaging="Tape and Reel", Polarity=N-CHANNEL, Power Dissipation=3.2W, Radiation Hardening=No, Rds On Max=3.7mR, REACH SVHC="No SVHC", Rise Time=13.1ns, RoHS Compliant=Yes, Series=NexFET™, Turn-Off Delay Time=18.4ns, Turn-On Delay Time=7.8ns, Width=5mm
R1 R2 R3 R4 R5: library part CMP-07231-003873-1, "Thick Film Chip Resistors 0805 10kΩ 0.125W 5% 200ppm/°C", Case Code (Imperial)=0805, Case Code (Metric)=2012, Max Operating Temperature=155°C, Max Power Dissipation=125mW, Min Operating Temperature=-55°C, Package Quantity=1, Resistance=10kR, Temperature Coefficient=200ppm/°C, Tolerance=5%, Voltage Rating=150V, Voltage Rating (DC)=100V, Case/Package=0805, Composition="Thick Film", Contact Plating=Tin, Depth=1.25mm, Features="Moisture Resistant", Height=0.5mm, Length=2mm, Military Standard=Not, Mount="Surface Mount", Number of Pins=2, Number of Terminations=2, Packaging="Tape and Reel", Power Rating=125mW, Radiation Hardening=No, REACH SVHC="No SVHC", Termination=SMD/SMT, Thickness=508um, Width=1.25mm
Regulator: "Integrated Circuit", Arrow Part Number=LM2940IMPX-5.0/NOPB, Manufacturer_Name="Texas Instruments", Mouser Part Number=926-LM2940IMPX50NOPB, Arrow Price/Stock=https://www.arrow.com/en/products/lm2940impx-5.0nopb/texas-instruments?region=nac, Datasheet Link=http://www.ti.com/lit/gpn/lm2940-n, Height=1.8mm, Manufacturer_Part_Number=LM2940IMPX-5.0/NOPB, Mouser Price/Stock=https://www.mouser.co.uk/ProductDetail/Texas-Instruments/LM2940IMPX-5.0-NOPB?qs=X1J7HmVL2ZELzMHXu8bpyQ%3D%3D
RHall: library part RC0402JR-0710KL, "Resistor", Manufacturer_Name=KEMET, Mouser Part Number=603-RC0402JR-0710KL, Datasheet Link=http://www.yageo.com/documents/recent/PYu-RC0402_51_RoHS_L_6_r.pdf, Height=0.4mm, Manufacturer_Part_Number=RC0402JR-0710KL, Mouser Price/Stock=https://www.mouser.co.uk/ProductDetail/YAGEO/RC0402JR-0710KL?qs=V1yeUXFNrkk4BhFptVo0Rw%3D%3D
Rp1: library part ERJ-2RKF5902X, "Resistor", Manufacturer_Name=Panasonic, Mouser Part Number=667-ERJ-2RKF5902X, Arrow Part Number=ERJ-2RKF5902X, Arrow Price/Stock=https://www.arrow.com/en/products/erj-2rkf5902x/panasonic?region=nac, Datasheet Link=https://industrial.panasonic.com/cdbs/www-data/pdf/RDA0000/AOA0000C86.pdf, Height=0.4mm, Manufacturer_Part_Number=ERJ-2RKF5902X, Mouser Price/Stock=https://www.mouser.co.uk/ProductDetail/Panasonic/ERJ-2RKF5902X?qs=YMBIwoNQYdVdwi4zXGse%252Bw%3D%3D
Rp2: library part RC0603FR-106K8L, "Resistor", Manufacturer_Name=KEMET, Mouser Part Number=603-RC0603FR-106K8L, Datasheet Link=http://www.yageo.com/documents/recent/PYu-RC0603_51_RoHS_L_v5.pdf, Height=0.55mm, Manufacturer_Part_Number=RC0603FR-106K8L, Mouser Price/Stock=https://www.mouser.co.uk/ProductDetail/YAGEO/RC0603FR-106K8L?qs=Iqe6t0HYRD4RKBucIg6YEg%3D%3D
Rp3: library part ERJ-2RKF2001X, "Resistor", Manufacturer_Name=Panasonic, Mouser Part Number=667-ERJ-2RKF2001X, Arrow Part Number=ERJ-2RKF2001X, Arrow Price/Stock=https://www.arrow.com/en/products/erj-2rkf2001x/panasonic?region=europe, Datasheet Link=https://industrial.panasonic.com/cdbs/www-data/pdf/RDA0000/AOA0000C86.pdf, Height=0.4mm, Manufacturer_Part_Number=ERJ-2RKF2001X, Mouser Price/Stock=https://www.mouser.co.uk/ProductDetail/Panasonic/ERJ-2RKF2001X?qs=H7k1u0Mp9JSbtBe1nkwQGA%3D%3D

## Via types
v1: diameter 50, hole 28, Top Layer to Bottom Layer, 30 vias

## Nets (pads, with @x,y where several pads share a name; then routed paths per layer and width w, separated by ;. In a path a pad name is that pad's centre, name@x,y a point inside that pad or via, vN(x,y) a via of type N, cw(c..) or ccw(c..) an arc to the next point about the centre after c; other vN are vias at no path point)
5V_Out: C1Hall.1 C3.1 CL.1 FETDriver.12 HallEffect.1 LineCamera.4 Regulator.3 Servo.1 | length 34.2
  Top Layer w18: FETDriver.12 FETDriver.12@-2131,-504 ; C3.1@-1587.46,-423 C3.1
12V_Out: Cp4.1 Cp5.1 Diode.2 Regulator.1 Rp1.1
+3.3V: J9.4 J9.8 RHall.1 | length 1391.8
  Top Layer w18: J9.8 -1800,-2064 -1770,-2094 -647.31,-2094 RHall.1
+V_BATTERY: "Boost Converter.7" Cp1.1 J5.1 J9.16 L1.1 Motor.2 Q1.5-6-7-8
GND: "Boost Converter.4" "Boost Converter.8" C1Hall.2 C2Hall.2 CL.2 Cp1.2 Cp3.2 Cp4.2 Cp5.2 FETDriver.7 HallEffect.2 J2.14 J5.2 J9.12 J9.14 LineCamera.5 Q2.1 Q2.2 Q2.3 R3.1 R4.1 R5.1 Regulator.2 Regulator.4 Rp2.2 Rp3.2 Servo.3 | length 129.4
  Top Layer w18: v1(-2717,-494) -2716.5,-493.5 -2688.5,-493.5 Q2.1 Q2.2 Q2.3
  other v1: -2437,-1907 -2228,-1873 -2652,-1865 -483,-1835 -2884,-1777 -2344,-1732 -2539,-1729 -2060,-1658 -1473,-1611 -2224,-1595 -2651,-1594 -2061,-1587 -2433,-1554 -2063,-1446 -2439,-1420 -1468,-1420 -2919,-1399 -3025,-1304 -2437,-1304 -1622,-1243 -1131,-1155 -763,-1106 -1619,-908 -1572,-770 -1573,-650 -1572,-534 -1843,-503
"NetBoost Converter_1": "Boost Converter.1" Cp2.1 | length 288.1
  Top Layer w18: -2288,-1362 -2288,-1389.5 -2197.81,-1479.69 -2107.48,-1479.69 -2086.2,-1500.97 -2086.2,-1513.52 Cp2.1
"NetBoost Converter_2": "Boost Converter.2" Rp1.2 Rp2.1 | length 361.5
  Top Layer w18: -2338,-1362 -2338,-1334.5 -2320.5,-1317 -2320.5,-1310.79 -2311.71,-1302 -2203.51,-1302 -2127,-1378.51 Rp1.2 -2127,-1379.49 -2145.59,-1398.08 Rp2.1
"NetBoost Converter_5": "Boost Converter.5" Diode.1 Diode.3 L1.2 | length 722.9
  Top Layer w18: -2488,-1362 -2488,-1139.16 -2429.84,-1081 L1.2 -2410.16,-1081 -2321.2,-992.04 Diode.1 Diode.3
NetC1_1: C1.1 FETDriver.11 | length 125.7
  Top Layer w18: C1.1 -2215.01,-427 -2188.01,-454 FETDriver.11
NetC1_2: C1.2 FETDriver.10 | length 214.7
  Top Layer w18: C1.2@-2337.45,-424.02 C1.2 -2320.77,-410.32 -2320.77,-398.21 -2305.9,-383.33 -2208.68,-383.33 -2188.01,-404 FETDriver.10
NetC2_1: C2.1 FETDriver.9 | length 796.7
  Top Layer w18: C2.1 -2334.45,-505.56 -2378.13,-461.88 -2378.13,-392.12 -2345.34,-359.33 -1863.66,-359.33 -1819,-404 FETDriver.9
NetC2_2: C2.2 FETDriver.13 | length 112.7
  Top Layer w18: C2.2 -2191.01,-551 -2188.01,-554 FETDriver.13
NetC3_2: C3.2 FETDriver.8 | length 127.1
  Top Layer w18: FETDriver.8 -1712.95,-454 -1681.95,-423 C3.2
NetCp2_2: Cp2.2 Cp3.1 Rp3.1 | length 151.5
  Top Layer w18: Rp3.1 -2127.31,-1603.43 -2111.14,-1587.25 Cp3.1 -2111.14,-1515.24 -2112.13,-1514.25 Cp2.2
NetFETDriver_3: FETDriver.3 R3.2 | length 157.4
  Top Layer w18: FETDriver.3 -1735.07,-704 -1676.05,-763.02 R3.2 R3.2@-1684.95,-760.1
NetFETDriver_4: FETDriver.4 R4.2 | length 114
  Top Layer w18: FETDriver.4 -1789.26,-652.77 -1678.76,-652.77 R4.2
NetFETDriver_5: FETDriver.5 R5.2 | length 145.4
  Top Layer w18: FETDriver.5 -1741.48,-604 -1677.53,-540.05 R5.2
NetFETDriver_15: FETDriver.15 R1.2 | length 121.8
  Top Layer w18: R1.2 -2267.47,-673.02 -2248.46,-654 FETDriver.15
NetFETDriver_16: FETDriver.16 R2.2 | length 162.4
  Top Layer w18: R2.2@-2264.95,-794.02 R2.2 -2253.12,-788.17 -2253.12,-769.1 -2188.01,-704 FETDriver.16
NetFETDriver_17: FETDriver.17 Q2.4 | length 731.7
  Top Layer w18: Q2.4 -2538,-494.48 -2488.52,-494.48 -2418,-565 -2418,-617.06 -2416,-619.06 -2416,-821.78 -2395.97,-841.81 -2237.9,-841.81 -2225.14,-829.05 -2225.14,-791.13 -2188.01,-754 FETDriver.17
NetFETDriver_18: FETDriver.18 Q1.4 | length 914.7
  Top Layer w18: Q1.4 -2730.24,-624.24 -2676,-570 -2499,-570 -2440,-629 -2440,-845.78 -2419.97,-865.81 -2227.96,-865.81 -2189.5,-827.36 -2189.5,-805.49 -2188.01,-804 FETDriver.18
NetMotor_1: Motor.1 Q1.1 Q1.2 Q1.3 Q2.5-6-7-8 | length 1.5
  Top Layer w18: Q1.2@-2636.24,-644.86 Q1.2@-2636.24,-643.38
P5V_USB: J9.10
PTA1: J1.2
PTA2: J1.4
PTA4: J1.10
PTA5: J1.12
PTA12: J1.8
PTA13: J2.2
PTA16: J2.9
PTA17: J2.11
PTB0: J10.2 Servo.2 | length 427.1
  Top Layer w18: Servo.2 -1247.5,-1672.5 -1247.5,-1952.5 J10.2
PTB1: J10.4 R1.1 | length 2530.1
  Top Layer w18: R1.1 R1.1@-2336.53,-673.02
  Bottom Layer w18: v1(-2367,-680) -2360.88,-686.12 -2343.33,-686.12 -2340.46,-689 -1793,-689 -1647,-835 -1438,-835 -1194,-1079 -1194,-1748 -1274,-1828 -1274,-1840 -1275,-1841 -1275,-2029 -1256.5,-2047.5 -1147.5,-2047.5 J10.4
PTB2: J10.6 R2.1 | length 2624.6
  Top Layer w18: J10.6@-1008.68,-1991.32 J10.6
  Bottom Layer w18: v1(-2367,-798) -1738,-798 -1668,-868 -1456,-868 -1225.5,-1098.5 -1225.5,-1730.5 -1309,-1814 -1309,-2057 -1284,-2082 -1082,-2082 J10.6
PTB3: J10.8
PTB8: J9.1
PTB9: J9.3
PTB10: J9.5
PTB11: J9.7
PTC0: J1.3
PTC1: J10.12 LineCamera.2 | length 627.2
  Top Layer w18: LineCamera.2 -1014,-1580 -749.69,-1844.31 -688.51,-1844.31 -652.5,-1880.32 -652.5,-1952.5 J10.12
PTC2: J10.10
PTC3: J1.5
PTC4: J1.7
PTC5: J1.9
PTC6: J1.11
PTC7: J1.1
PTC8: J1.14
PTC9: J1.16
PTC10: J1.13
PTC11: J1.15
PTC12: J2.1
PTC13: J2.3
PTC16: J2.5
PTC17: J2.7
PTD0: J2.6
PTD1: J2.12
PTD2: J2.8
PTD3: J2.10
PTD4: J1.6
PTD5: J2.4
PTD6: J2.17
PTD7: J2.19
PTE0: J2.18
PTE1: J2.20
PTE2: J9.9
PTE3: J9.11
PTE4: J9.13
PTE5: J9.15
PTE20: J10.1 LineCamera.1 | length 355.6
  Top Layer w18: J10.1 -1115,-1815 -1116,-1814 LineCamera.1
PTE21: J10.3
PTE22: J10.5
PTE23: J10.7
PTE29: J10.9 LineCamera.3 | length 627.5
  Top Layer w18: LineCamera.3 -963.48,-1532.52 -1035.67,-1532.52 -1063.48,-1560.33 -1063.48,-1636.52 J10.9
PTE30: J10.11
PTE31: J2.13
RESET/PTA20: J9.6
SDA_PTD5: J9.2
Vo: C2Hall.1 HallEffect.3 RHall.2 | length 664.8
  Top Layer w18: RHall.2 -486.05,-2209 -483,-2205.95 C2Hall.1 -441.66,-2035.42 -318,-1911.76 HallEffect.3
VREFH: J2.16
pads on no net: "Boost Converter.3" "Boost Converter.6" FETDriver.1 FETDriver.2 FETDriver.6 FETDriver.14 J2.15 J3.1 J3.2 J3.3 J3.4 J3.5 J3.6 J3.7 J3.8 J3.9 J3.10 J3.11 J3.12 J3.13 J3.14 J3.15 J3.16 J4.1 J4.2 J4.3 J4.4 J4.5 J4.6 J4.7 J4.8 J4.9 J4.10 J4.11 J4.12 J6.1 J6.2 J6.3 J6.4 J6.5 J6.6 J6.7 J6.8 J6.9 J6.10 J6.11 J6.12 J6.13 J6.14 J6.15 J6.16 J6.17 J6.18 J6.19 J6.20 J7.1 J7.2 J7.3 J7.4 J7.5 J7.6 J7.7 J7.8 J7.9 J7.10 J7.11 J7.12 J7.13 J7.14 J7.15 J7.16

## Polygon pours and split planes (outlines as drawn)
"NetBoost Converter_5" on Top Layer "Thermal_Dissipation_GND" (solid, pour order 54): -2141,-847 -2141,-1536 -2139,-1538 -2147,-1546 -2525,-1546 -2525,-846 -2524,-845
5V_Out on Top Layer "5V_OUT_L01_P047" (solid, pour order 47): -1607,-1799 -1594,-1812 -253,-1812 -253,-1499 -251,-1497 -304,-1444 -649,-1444 -649,-1239 -669,-1219 -677,-1227 -1460,-1227 -1460,-357 -1466,-351 -1470,-355 -1629,-355 -1629,-478 -1649,-458 -2211,-458 -2211,-524 -2216,-529 -2205,-540 -1594,-540 -1593,-541 -1603,-551 -1603,-1359
+V_BATTERY on Top Layer "+V_BATTERY_L01_P044" (solid, remove dead copper, pour order 44): -3175.6,-707 -2525,-707 -2525,-1947 -1348.5,-1947 -1348.5,-2079 -3016.39,-2085.91 -3075.51,-2009.39 -3116,-1947 -3153,-1850 -3187.5,-1718 -3188.5,-1660 -3187.5,-1659 -3187.5,-1521
NetMotor_1 on Top Layer "NETMOTOR_1_L01_P046" (solid, pour order 46): -3106,-186 -3172,-252 -3172,-700 -2406,-700 -2406,-186
12V_Out on Top Layer "12V_OUT_L01_P041" (solid, remove dead copper, pour order 41): -2119,-845.89 -2119,-1414 -1899,-1414 -1899,-1652 -1855,-1696 -1622,-1696 -1622,-845.24
PTB2 on Bottom Layer "PTB2_L02_P052" (solid, pour order 52): -2396,-742 -2396,-875 -2390,-881 -2390,-1955 -1473,-1955 -941,-2330 -941,-1943 -1028,-1943 -1040,-1955 -1015,-2174 -1404.75,-1902 -2308,-1902 -2308,-881 -2281,-854 -2188,-854 -2188,-758 -2205,-741 -2388,-741
GND on Bottom Layer "GND_L02_P007" (solid, pour order 7): -3143,-132 -3034,21 -2756,238 -494.86,253.18 -41.62,-184.43 -57,-1961 -403,-2328 -2546.86,-2350.86 -2849.57,-2250.98 -3181.18,-1707.97
PTB1 on Bottom Layer "PTB1_L02_P051" (solid, pour order 51): -2394,-629 -2400,-635 -2400,-733 -1942,-733 -1854,-821 -1854,-1877 -1261,-1877 -1161,-1977 -1161,-2087 -1048,-2087 -1048,-1824 -1705,-1824 -1785,-1744 -1785,-629

## Silkscreen, mask and mechanical layers (free items; w line width, h text height)
Top Overlay:
  drawing of 1850 lines, arcs and shapes, not listed